# Allegro board BQ24090_TEST_V10A.brd
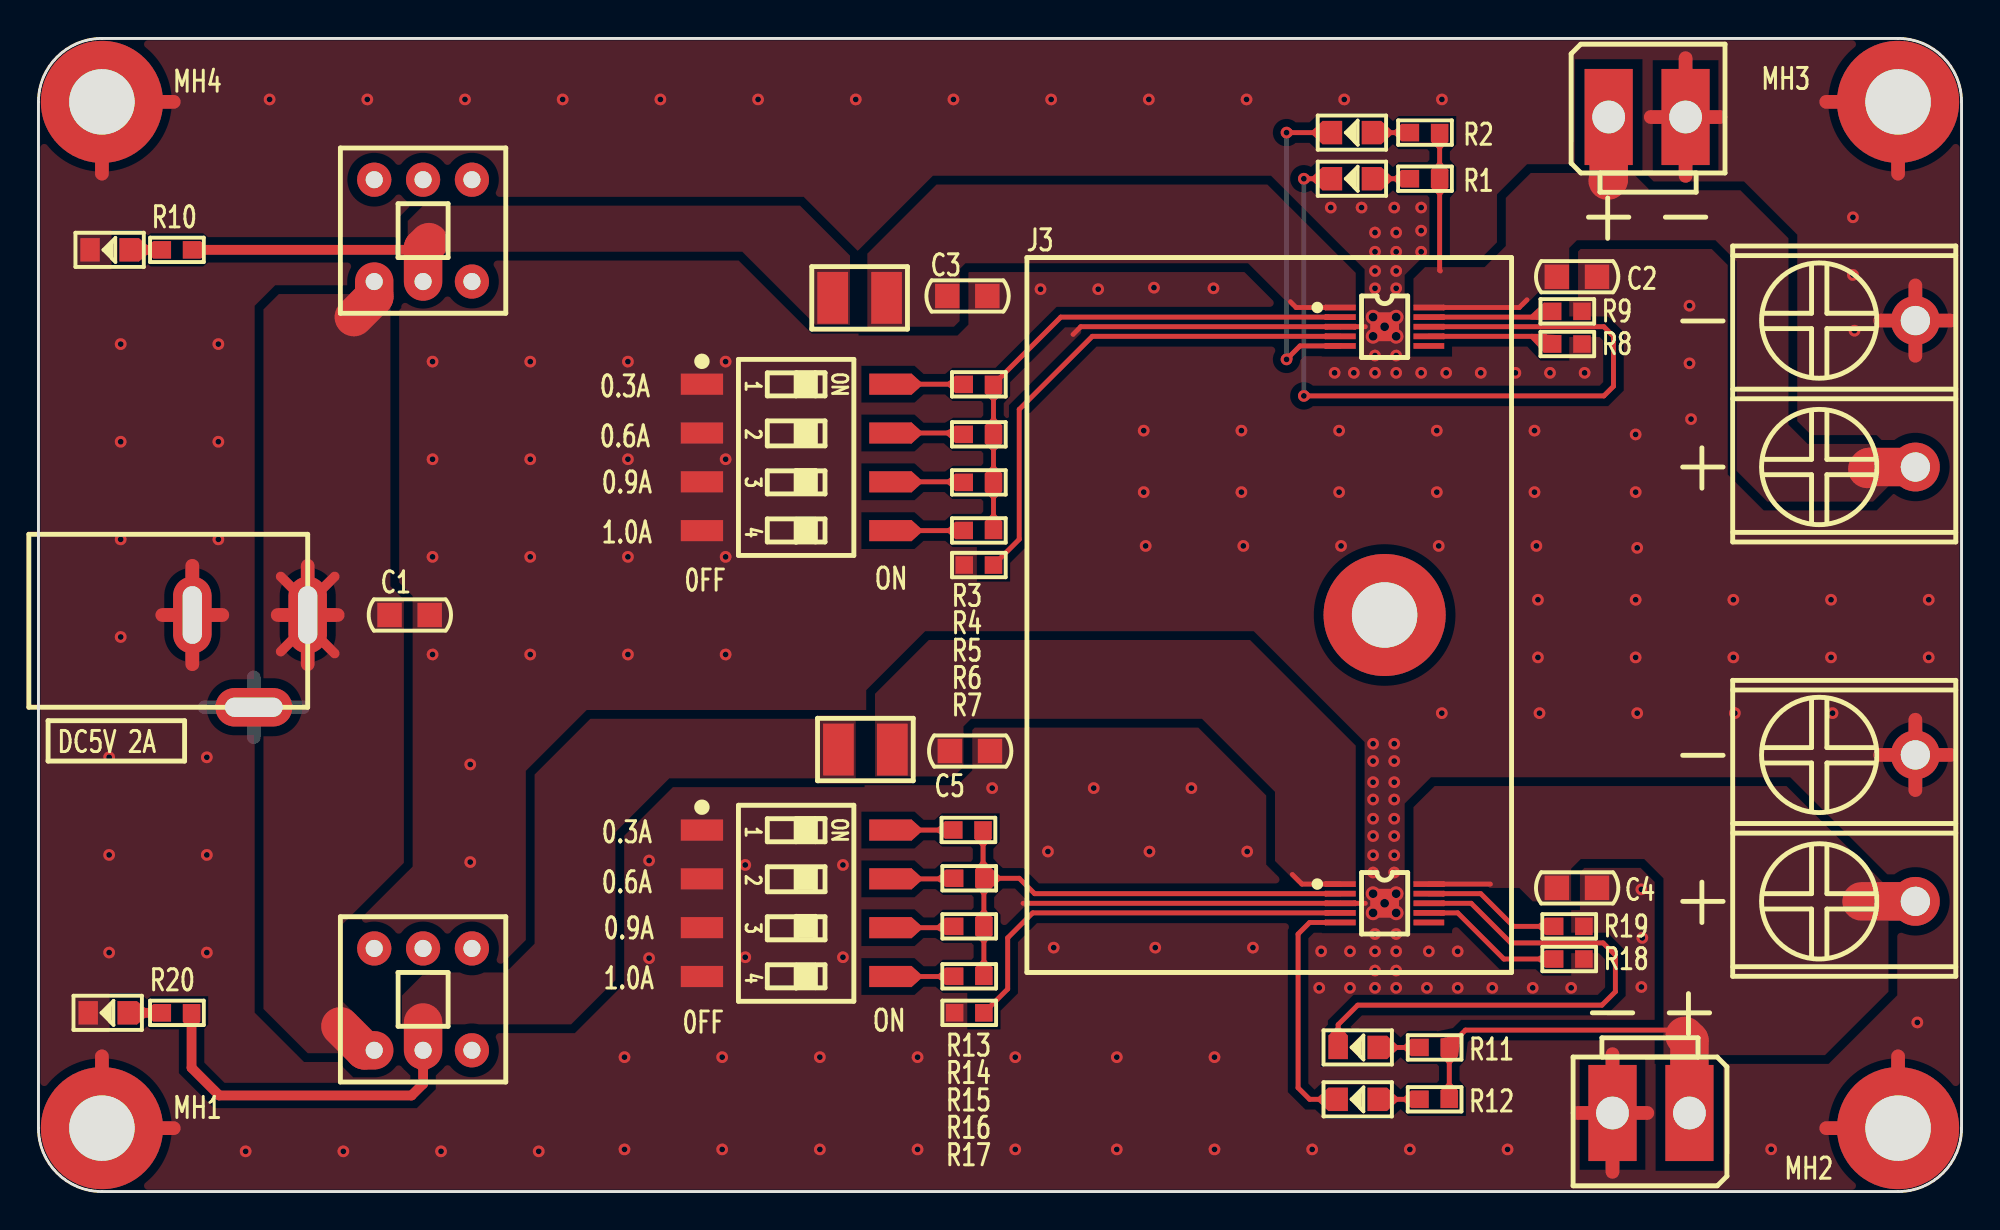
[diagram p0: board, top side]
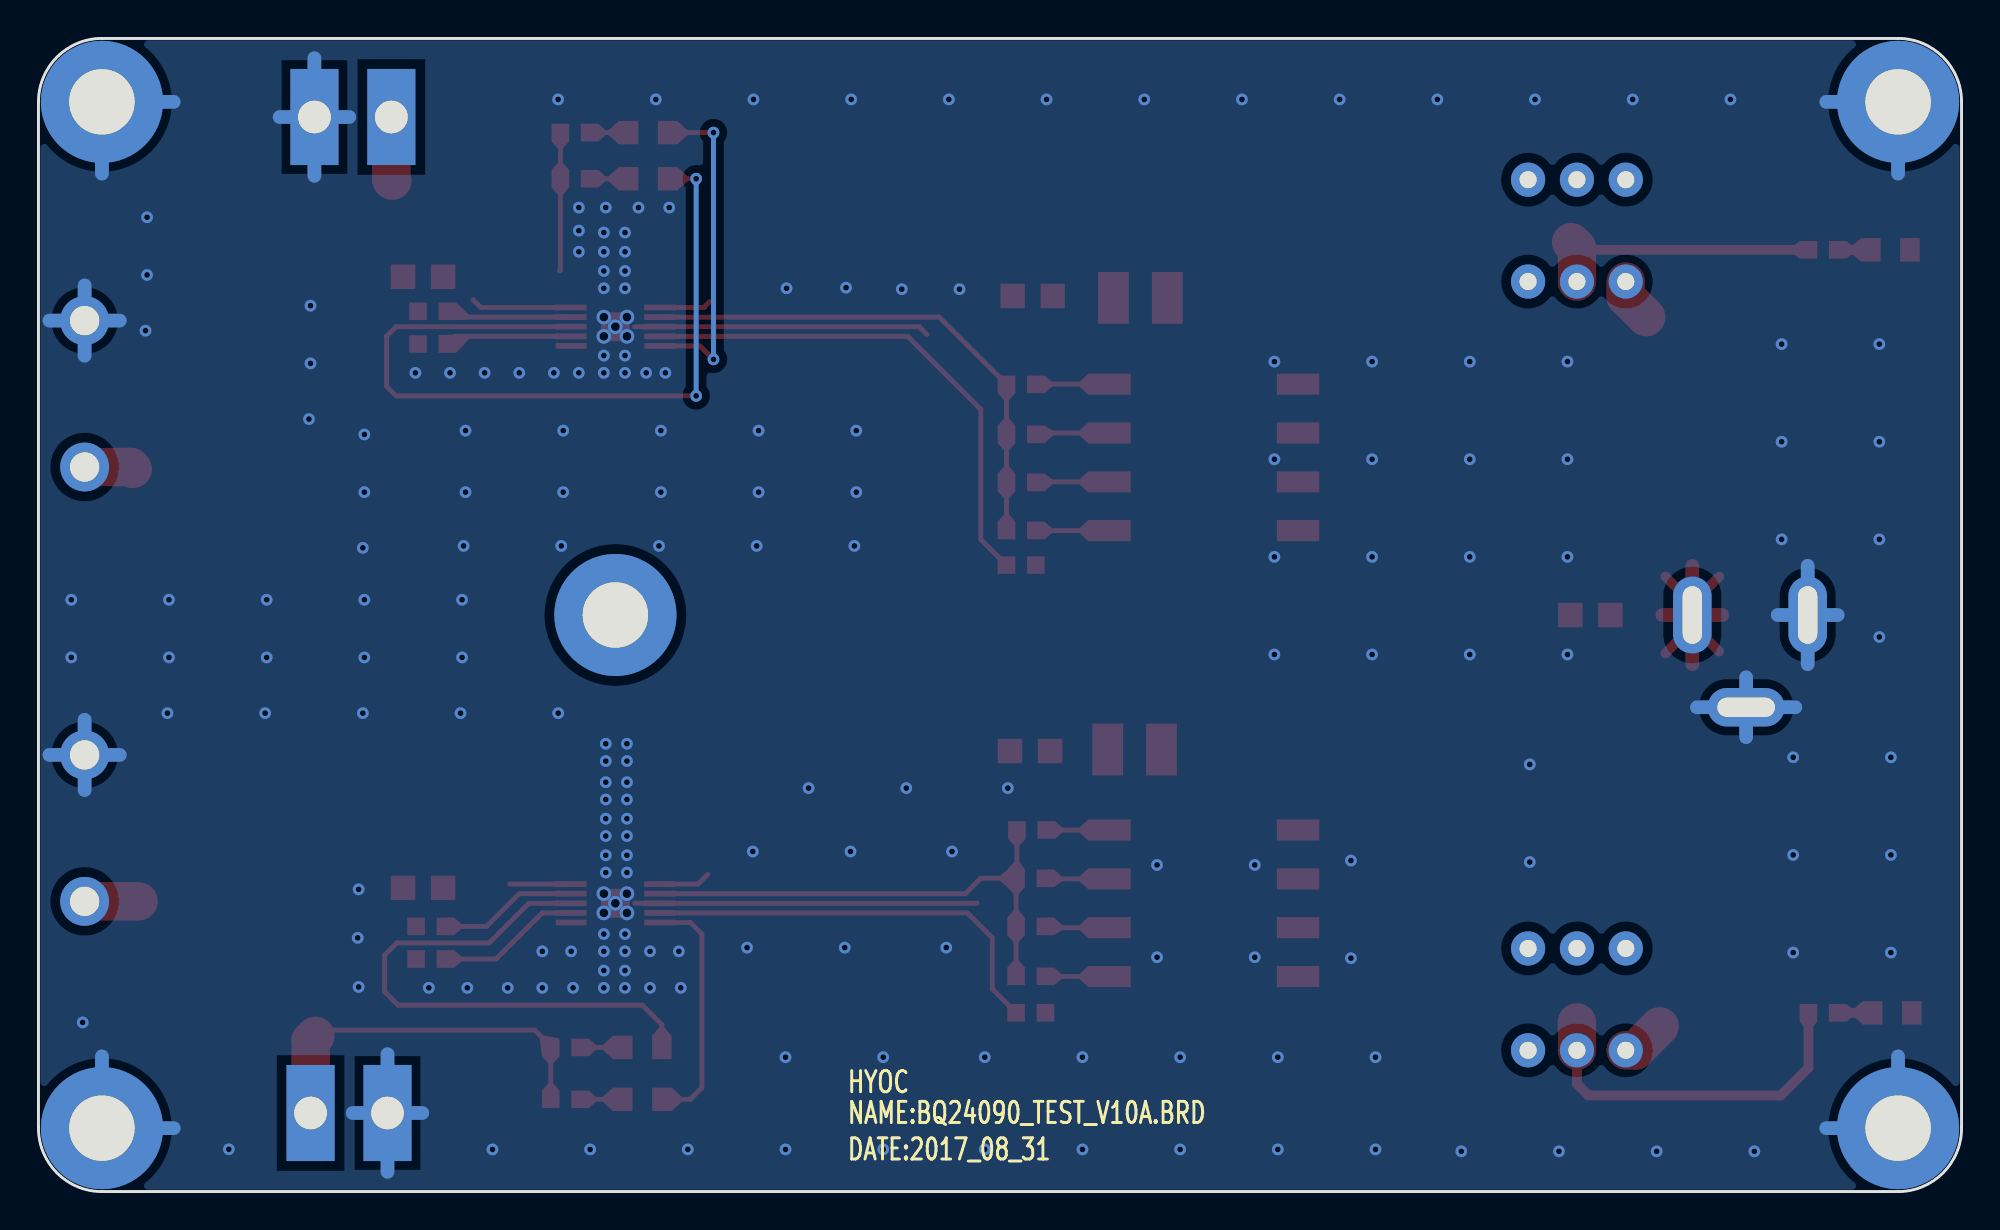
[diagram p1: board, bottom side, seen from below]

Outline 100 x 60 mm; copper layers: TOP, BOTTOM. Coordinates in mm from the lower left corner of the outline.
Outline path: 0,56.7 0,3.3 arc(0.97,0.97) 3.3,0 96.7,0 arc(99.03,0.97) 100,3.3 100,56.7 arc(99.03,59.03) 96.7,60 3.3,60 arc(0.97,59.03) 0,56.7

## Placement (name value [footprint] x y rotation side)
C1  10uF_25V  [CC0805]  19.3 30 0 top
C2  10uF_25V  [CC0805]  80 47.6 0 top
C3  10uF_25V  [CC0805]  48.3 46.6 0 top
C4  10uF_25V  [CC0805]  80 15.8 0 top
C5  10uF_25V  [CC0805]  48.44 22.92 0 top
D1  LED_RED  [LED0805]  68.3 52.7 180 top
D2  LED_GREEN  [LED0805]  68.3 55.1 180 top
D3  LED_GREEN  [LED0805]  3.7 49 180 top
D4  LED_RED  [LED0805]  68.6 7.5 180 top
D5  LED_GREEN  [LED0805]  68.6 4.8 180 top
D6  LED_GREEN  [LED0805]  3.6 9.3 180 top
DC1  -  [DC005]  8 30 0 top
F1  SMD1210-6V2A  [SMD-1210]  42.7 46.5 0 top
F2  SMD1210-6V2A  [SMD-1210]  43 23 0 top
J1  -  [POWER2A]  87.7 53 90 top
J2  -  [KF7R62-2P]  97.6 37.7 90 top
J3  HEAT-37x25x20  [HEAT-37X25X20]  70 30 90 top
J4  -  [POWER2A]  79.8 7 270 top
J5  -  [KF7R62-2P]  97.6 15.1 90 top
MH1  HOLD-M3  [HOLD250D134]  3.3 3.3 0 top
MH2  HOLD-M3  [HOLD250D134]  96.7 3.3 0 top
MH3  HOLD-M3  [HOLD250D134]  96.7 56.7 0 top
MH4  HOLD-M3  [HOLD250D134]  3.3 56.7 0 top
NOREF  -  []  0 0 90 top
NOREF#2  -  []  0 0 0 top
NOREF#3  -  []  0 0 90 top
NOREF#4  -  []  0 0 0 top
NOREF#5  -  []  0 0 90 top
NOREF#6  -  []  0 0 0 top
R1  1.5K  [RC0603]  72.1 52.7 0 top
R2  1.5K  [RC0603]  72.1 55.1 0 top
R3  1.8K  [RC0603]  48.9 42 180 top
R4  900R  [RC0603]  48.9 39.4 180 top
R5  600R  [RC0603]  48.9 36.9 180 top
R6  540R  [RC0603]  48.9 34.4 180 top
R7  2K  [RC0603]  48.9 32.6 180 top
R8  10K  [RC0603]  79.5 44.1 0 top
R9  10K  [RC0603]  79.5 45.8 0 top
R10  1.5K  [RC0603]  7.2 49 0 top
R11  1.5K  [RC0603]  72.6 7.5 0 top
R12  1.5K  [RC0603]  72.6 4.8 0 top
R13  1.8K  [RC0603]  48.36 18.82 180 top
R14  900R  [RC0603]  48.4 16.3 180 top
R15  600R  [RC0603]  48.4 13.8 180 top
R16  540R  [RC0603]  48.4 11.2 180 top
R17  2K  [RC0603]  48.4 9.3 180 top
R18  10K  [RC0603]  79.6 12.1 0 top
R19  10K  [RC0603]  79.6 13.8 0 top
R20  1.5K  [RC0603]  7.2 9.3 0 top
SW1  -  [DM-04-V]  39.4 38.2 270 top
SW2  -  [DM-04-V]  39.4 15 270 top
U1  BQ24090DGQR  [HVSSOP-10]  70 45 270 top
U2  -  [SWITCH_6P]  20 50 0 top
U3  BQ24090DGQR  [HVSSOP-10]  70 15 270 top
U4  -  [SWITCH_6P]  20 10 0 top

## Library data of the parts
C1-C5 = CAP NP_2
D1-D6 = LED_4
DC1 = DC005
F1 F2 = FUSE
J1 J4 = CON2
J2 J5 = CONN RCPT 2
J3 = HEAT-37x25x20
MH1-MH4 = Hold_1
R1-R20 = R_Generic
SW1 SW2 = SW DIP-4_0
U1 U3 = BQ24090
U2 U4 = SWITCH_6P

## Footprints (pads in the part's own frame, mm; a bottom-side part is the same pattern mirrored in y, then rotated)
CC0805
  rect 1.27x1.27 smd: 1(-1.041,0) 2(1.041,0)
DC005
  oval 2x4 hole 1x3: 1(6,0) 2(0,0)
  oval 4x2 hole 3x1: 3(3.2,-4.8)
DM-04-V
  rect 1.1x2.2 smd: 1(-3.81,-4.9) 2(-1.27,-4.9) 3(1.27,-4.9) 4(3.81,-4.9) 5(3.81,4.9) 6(1.27,4.9) 7(-1.27,4.9) 8(-3.81,4.9)
HEAT-37X25X20
  round 6.35 hole 3.404: 1(0,0)
HOLD250D134
  round 6.35 hole 3.404: 1(0,0)
HVSSOP-10
  rect 0.3x1.6 smd: 1(-1,-2.3) 2(-0.5,-2.3) 3(0,-2.3) 4(0.5,-2.3) 5(1,-2.3) 6(1,2.3) 7(0.5,2.3) 8(0,2.3) 9(-0.5,2.3) 10(-1,2.3)
  rect 1.5x1.5 smd: 11(0,0)
KF7R62-2P
  round 2.54 hole 1.524: 1(0,0) 2(7.62,0)
LED0805
  rect 1.016x1.219 smd: 1(-1.016,0) 2(1.016,0)
POWER2A
  rect 5x2.5 hole 1.7: 1(2.912,6.05) 2(2.912,2.05)
RC0603
  rect 0.914x0.914 smd: 1(-0.762,0) 2(0.762,0)
SMD-1210
  rect 1.6x2.7 smd: 1(-1.4,0) 2(1.4,0)
SWITCH_6P
  round 1.778 hole 0.889: 1(-2.54,-2.65) 2(0,-2.65) 3(2.54,-2.65) 4(2.54,2.65) 5(0,2.65) 6(-2.54,2.65)

## Nets
GND: C1.2 C2.2 C3.2 C4.2 C5.2 D3.2(CATHODE) D6.2(CATHODE) DC1.2 DC1.3 J1.2 J2.2 J4.2 J5.2 MH1.1 MH2.1 MH3.1 MH4.1 R7.2 R8.2 R9.2 R17.2 R18.2 R19.2 SW1.1 SW1.2 SW1.3 SW1.4 SW2.1 SW2.2 SW2.3 SW2.4 U1.3(VSS) U1.11(GND) U3.3(VSS) U3.11(GND)
VCC_5V: C1.1 DC1.1 U2.1 U4.1
VCC_VBAT1: C2.1 J1.1 J2.1 R1.2 R2.2 U1.10(OUT)
VCC_VBAT2: C4.1 J4.1 J5.1 R11.2 R12.2 U3.10(OUT)
BAT_#CHG1: D1.2(CATHODE) U1.8(C\H\G\)
BAT_#CHG2: D4.2(CATHODE) U3.8(C\H\G\)
BAT_#PG1: D2.2(CATHODE) U1.5(P\G\)
BAT_#PG2: D5.2(CATHODE) U3.5(P\G\)
N16776719: R8.1 U1.7(ISET2)
N16776765: C3.1 F1.2 U1.1(IN)
N16776879: R6.2 SW1.5
N16776893: R3.1 R4.1 R5.1 R6.1 U1.2(ISET)
N16776901: R7.1 U1.4(PRETERM)
N16777207: D2.1(ANODE) R2.1
N16777228: D1.1(ANODE) R1.1
N16796255: R9.1 U1.9(TS)
N16796428: R5.2 SW1.6
N16796448: R4.2 SW1.7
N16796468: R3.2 SW1.8
N16797086: R18.1 U3.7(ISET2)
N16797101: C5.1 F2.2 U3.1(IN)
N16797155: R16.2 SW2.5
N16797170: R13.1 R14.1 R15.1 R16.1 U3.2(ISET)
N16797177: R17.1 U3.4(PRETERM)
N16797234: D5.1(ANODE) R12.1
N16797242: D4.1(ANODE) R11.1
N16797325: R19.1 U3.9(TS)
N16797348: R15.2 SW2.6
N16797366: R14.2 SW2.7
N16797368: R13.2 SW2.8
N16797989: F1.1 R10.2 U2.2
N16798336: F2.1 R20.2 U4.2
N16798401: D6.1(ANODE) R20.1
N16798575: D3.1(ANODE) R10.1

Pads without a net: J3 1; U1 6; U2 3 4 5 6; U3 6; U4 3 4 5 6

## Via types
v1: diameter 0.61, hole 0.305, TOP to BOTTOM, 193 vias
v2: diameter 0.762, hole 0.457, TOP to BOTTOM, 10 vias

## Routing (per net, layer and track width the routed paths; a pad name or vN(x,y) marks a point on that pad's centre or on a via; arc(x,y) is an arc through that point)
GND: length 185.8
  TOP w0.254: 69,15 U3.3 51.2,15 ; 69,45 U1.3 54.2,45 53.8,44.6
  TOP w0.711: 97.6,43.49 J2.2 ; J2.2 95.77,45.32 ; J2.2 97.6,47.15 ; J2.2 99.43,45.32 ; 95.77,22.72 J5.2 ; J5.2 99.43,22.72 ; J5.2 97.6,24.55 ; J5.2 97.6,20.89 ; 3.3,52.97 MH4.1 7.03,56.7 ; 81.85,1.03 J4.2 ; J4.2 81.85,7.15 ; J4.2 83.66,4.09 ; J4.2 80.04,4.09 ; J1.2 85.65,58.97 ; J1.2 83.84,55.91 ; J1.2 87.46,55.91 ; J1.2 85.65,52.85 ; 96.7,7.03 MH2.1 92.97,3.3 ; 92.97,56.7 MH3.1 96.7,52.97 ; 6.44,30 DC1.2 ; DC1.2 9.56,30 ; DC1.2 8,27.44 ; DC1.2 8,32.56 ; 3.3,7.03 MH1.1 7.03,3.3
  BOTTOM w0.711: 8.64,25.2 DC1.3 ; DC1.3 11.2,26.76 ; DC1.3 11.2,23.64 ; DC1.3 13.76,25.2 ; DC1.2 9.56,30 ; DC1.2 8,27.44 ; DC1.2 8,32.56 ; DC1.2 6.44,30 ; 3.3,52.97 MH4.1 7.03,56.7 ; 81.85,1.03 J4.2 ; J4.2 80.04,4.09 ; J4.2 81.85,7.15 ; J4.2 83.66,4.09 ; 3.3,7.03 MH1.1 7.03,3.3 ; 95.77,45.32 J2.2 ; J2.2 97.6,43.49 ; J2.2 97.6,47.15 ; J2.2 99.43,45.32 ; 92.97,56.7 MH3.1 96.7,52.97 ; J1.2 87.46,55.91 ; J1.2 85.65,52.85 ; J1.2 85.65,58.97 ; J1.2 83.84,55.91 ; J5.2 99.43,22.72 ; J5.2 95.77,22.72 ; J5.2 97.6,20.89 ; J5.2 97.6,24.55 ; 96.7,7.03 MH2.1 92.97,3.3
  vias: v1(3.67,22.6) v1(3.67,17.52) v1(3.67,12.44) v1(4.28,44.1) v1(4.28,39.02) v1(4.28,33.94) v1(4.28,28.86) v1(8.76,22.6) v1(8.76,17.52) v1(8.76,12.44) v1(9.36,44.1) v1(9.36,39.02) v1(9.36,33.94) v1(10.77,2.09) v1(12.02,56.83) v1(15.85,2.09) v1(17.1,56.83) v1(20.49,43.18) v1(20.49,38.1) v1(20.49,33.02) v1(20.49,27.94) v1(20.93,2.09) v1(22.18,56.83) v1(22.45,22.22) v1(22.45,17.14) v1(25.57,43.18) v1(25.57,38.1) v1(25.57,33.02) v1(25.57,27.94) v1(26.01,2.09) v1(27.26,56.83) v1(30.47,6.99) v1(30.47,2.19) v1(30.65,43.18) v1(30.65,38.1) v1(30.65,33.02) v1(30.65,27.94) v1(31.75,17.22) v1(31.75,12.14) v1(32.34,56.83) v1(35.55,6.99) v1(35.55,2.19) v1(35.73,43.18) v1(35.73,38.1) v1(35.73,33.02) v1(35.73,27.94) v1(36.75,16.99) v1(36.75,12.19) v1(37.42,56.83) v1(40.63,6.99) v1(40.63,2.19) v1(41.83,16.99) v1(41.83,12.19) v1(42.5,56.83) v1(45.71,6.99) v1(45.71,2.19) v1(47.58,56.83) v1(49.59,20.99) v1(50.79,6.99) v1(50.79,2.19) v1(52.11,46.95) v1(52.49,17.69) v1(52.66,56.83) v1(52.79,12.69) v1(54.87,20.99) v1(55.11,46.95) v1(56.07,6.99) v1(56.07,2.19) v1(57.47,39.59) v1(57.47,36.39) v1(57.57,33.59) v1(57.74,56.83) v1(57.77,17.69) v1(58.01,47.03) v1(58.07,12.69) v1(59.95,20.99) v1(61.1,47) v1(61.15,6.99) v1(61.15,2.19) v1(62.55,39.59) v1(62.55,36.39) v1(62.65,33.59) v1(62.82,56.83) v1(62.85,17.69) v1(63.15,12.69) v1(66.23,2.19) v1(66.6,10.6) v1(66.7,12.5) v1(67.2,51.2) v1(67.4,42.6) v1(67.63,39.59) v1(67.63,36.39) v1(67.73,33.59) v1(67.9,56.83) v1(68.2,12.5) v1(68.2,10.6) v1(68.4,42.6) v1(68.8,51.2) v1(69.4,23.3) v1(69.4,22.4) v1(69.4,21.3) v1(69.4,20.4) v1(69.4,19.4) v1(69.4,18.5) v1(69.4,17.5) v1(69.4,16.6) v1(69.5,49.9) v1(69.5,48.9) v1(69.5,47.9) v1(69.5,47) v1(69.5,43.5) v1(69.5,42.6) v1(69.5,13.4) v1(69.5,12.5) v1(69.5,11.5) v1(69.5,10.6) v1(70.5,51.2) v1(70.5,23.3) v1(70.5,22.4) v1(70.5,21.3) v1(70.5,20.4) v1(70.5,19.4) v1(70.5,18.5) v1(70.5,17.5) v1(70.5,16.6) v1(70.6,49.9) v1(70.6,48.9) v1(70.6,47.9) v1(70.6,47) v1(70.6,43.5) v1(70.6,42.6) v1(70.6,13.4) v1(70.6,12.5) v1(70.6,11.5) v1(70.6,10.6) v1(71.31,2.19) v1(71.9,51.2) v1(71.9,50) v1(71.9,48.9) v1(71.9,42.6) v1(72.2,10.6) v1(72.3,12.5) v1(72.71,39.59) v1(72.71,36.39) v1(72.81,33.59) v1(72.98,56.83) v1(72.97,24.89) v1(73.2,42.6) v1(73.8,12.5) v1(73.8,10.6) v1(75,42.6) v1(75.6,10.6) v1(76.39,2.19) v1(76.8,42.6) v1(77.7,10.6) v1(77.79,39.59) v1(77.79,36.39) v1(77.89,33.59) v1(77.97,30.79) v1(77.97,27.79) v1(78.05,24.89) v1(78.6,42.6) v1(79.7,10.6) v1(80.4,42.6) v1(83.05,39.39) v1(83.05,36.39) v1(83.13,33.49) v1(83.05,30.79) v1(83.05,27.79) v1(83.13,24.89) v1(83.35,15.72) v1(83.4,13.2) v1(83.35,10.64) v1(85.85,46.09) v1(85.85,43.09) v1(85.93,40.19) v1(88.13,30.79) v1(88.13,27.79) v1(88.21,24.89) v1(90.1,2.2) v1(93.21,30.79) v1(93.21,27.79) v1(93.29,24.89) v1(94.35,50.69) v1(94.35,47.69) v1(94.43,44.79) v1(97.7,8.8) v1(98.29,30.79) v1(98.29,27.79) v2(69.4,45.5) v2(69.4,44.5) v2(69.4,15.5) v2(69.4,14.5) v2(70,45) v2(70,15) v2(70.6,45.5) v2(70.6,44.5) v2(70.6,15.5) v2(70.6,14.5)
VCC_5V: length 20.7
  TOP w0.508: 15.4,32 14,30.6 12.6,32 ; 14,29.5 12.6,28.1 ; 14,29.4 15.4,28
  TOP w0.711: 14,32.56 DC1.1 ; DC1.1 12.44,30 ; DC1.1 14,27.44 ; DC1.1 15.56,30
  TOP w2: U4.1 16.95,7.35 15.7,8.6 ; 16.4,45.5 17.46,46.56 U2.1
VCC_VBAT1: length 18.4
  TOP w0.254: 77.4,46.4 77,46 U1.10 ; R2.2 R1.2 72.86,47.94 72.9,47.9
  TOP w2: 95.1,37.6 95.2,37.7 J2.1 ; J1.1 81.65,52.65 81.6,52.6
VCC_VBAT2: length 25.6
  TOP w0.254: 85.6,8.1 85.3,8.4 74.2,8.4 73.36,7.56 R11.2 R12.2 ; U3.10 75.5,16
  TOP w2: J4.1 85.85,7.85 85.6,8.1 ; J5.1 94.8,15.1
BAT_#CHG1: length 41.5
  TOP w0.254: v1(65.8,41.4) 81.4,41.4 81.9,41.9 81.9,44.5 81.4,45 U1.8 ; v1(65.8,52.7) D1.2
  BOTTOM w0.254: v1(65.8,41.4) v1(65.8,52.7)
BAT_#CHG2: length 29
  TOP w0.254: U3.8 74.5,15 76.56,12.94 81.36,12.94 82,12.3 82,10.4 81.3,9.7 68.6,9.7 67.58,8.68 D4.2
BAT_#PG1: length 17.3
  TOP w0.254: D2.2 v1(64.9,55.1) ; v1(64.9,43.3) 65.6,44 U1.5
  BOTTOM w0.254: v1(64.9,55.1) v1(64.9,43.3)
BAT_#PG2: length 12.8
  TOP w0.254: D5.2 66.1,4.8 65.5,5.4 65.5,13.4 66.1,14 U3.5
N16776719: length 6.6
  TOP w0.254: R8.1 78.34,44.5 U1.7
N16776765: length 2.7
  TOP w0.254: U1.1 65.4,46 65.1,46.3
N16776879: length 3.8
  TOP w0.254: R6.2 48.13,34.39 SW1.5
N16776893: length 27.1
  TOP w0.254: R6.1 R5.1 R4.1 R3.1 53.16,45.5 U1.2
N16776901: length 26.9
  TOP w0.254: U1.4 54.8,44.5 51,40.7 51,33.94 R7.1
N16777207: length 2
  TOP w0.254: D2.1 R2.1
N16777228: length 2
  TOP w0.254: D1.1 R1.1
N16796255: length 6.7
  TOP w0.254: U1.9 78.64,45.5 78.74,45.6 R9.1
N16796428: length 3.9
  TOP w0.254: R5.2 48.11,36.93 SW1.6
N16796448: length 3.9
  TOP w0.254: SW1.7 48.07,39.47 R4.2
N16796468: length 3.8
  TOP w0.254: SW1.8 48.13,42.01 R3.2
N16797086: length 7.5
  TOP w0.254: R18.1 76.2,12.1 73.8,14.5 U3.7
N16797101: length 2.7
  TOP w0.254: U3.1 65.7,16 65.2,16.5
N16797155: length 3.3
  TOP w0.254: SW2.5 47.63,11.19 R16.2
N16797170: length 26.5
  TOP w0.254: R13.1 49.12,16.34 R14.1 ; R16.1 R15.1 R14.1 ; R14.1 51,16.3 51.8,15.5 U3.2
N16797177: length 22.3
  TOP w0.254: U3.4 51.7,14.5 50.4,13.2 50.4,10.54 R17.1
N16797234: length 2.2
  TOP w0.254: D5.1 R12.1
N16797242: length 2.2
  TOP w0.254: D4.1 R11.1
N16797325: length 7.2
  TOP w0.254: U3.9 75,15.5 76.7,13.8 R19.1
N16797348: length 3.4
  TOP w0.254: R15.2 47.57,13.73 SW2.6
N16797366: length 3.4
  TOP w0.254: R14.2 47.61,16.27 SW2.7
N16797368: length 3.3
  TOP w0.254: SW2.8 47.59,18.81 R13.2
N16797989: length 14.3
  TOP w0.508: R10.2 19.9,49 20,49.1
  TOP w2: 20.3,49.4 20,49.1 U2.2
N16798336: length 18.9
  TOP w0.508: R20.2 7.96,6.44 9.4,5 19.4,5 20,5.6 U4.2
  TOP w2: U4.2 20,8.8
N16798401: length 1.8
  TOP w0.508: D6.1 R20.1
N16798575: length 1.7
  TOP w0.508: R10.1 D3.1

## Copper pours and planes (outline as drawn; the poured copper is in the pictures)
GND on TOP: 99.9,56.7 98.96,58.96 96.7,59.9 3.3,59.9 1.05,58.95 0.1,56.7 0.1,3.3 1.05,1.05 3.3,0.1 96.7,0.1 98.95,1.05 99.9,3.3 ; 2 cut-outs
GND on BOTTOM: 99.9,56.7 98.96,58.96 96.7,59.9 3.3,59.9 1.05,58.95 0.1,56.7 0.1,3.3 1.05,1.05 3.3,0.1 96.7,0.1 98.95,1.05 99.9,3.3
VCC_5V on TOP: 17.9,46.7 18.3,46.3 18.3,31.5 19,30.8 19,17.1 15.8,13.9 15.8,9.9 16.9,8.8 16.9,8.3 15.8,7.2 14,7.2 11.7,9.5 11.7,45.9 12.5,46.7
VCC_VBAT1 on TOP: 71.5,45.9 77.1,45.9 78.1,46.9 79.6,46.9 79.6,49.1 80,49.5 87.2,49.5 88.3,48.4 88.3,37.5 89.9,35.9 95.4,35.9 96.2,36.7 96.2,38.1 95.4,38.9 92,38.9 91,39.9 91,49.6 88.5,52.1 83.8,52.1 82.9,53 77.6,53 76.3,51.7 76.3,49.2 75.2,48.1 72.1,48.1 71.5,47.5
VCC_VBAT2 on TOP: 71.5,15.8 77,15.8 77.7,15.1 79.7,15.1 79.7,16.8 80.2,17.3 83.5,17.3 84.5,16.3 84.5,7.1 92.9,7.1 96.2,10.4 96.2,15.8 90.9,21.1 72.6,21.1 71.5,20
N16776765 on TOP: 43.1,45 47.6,45 47.9,45.3 47.9,48 48.2,48.3 62.9,48.3 65.3,45.9 68.5,45.9 68.5,47.8 63.9,52.4 46.7,52.4 43.1,48.8
N16776879 on TOP (solid shape): 45.92,34.47 45.95,34.39 45.92,34.31 45.4,33.84 44.27,34.39 45.4,34.94
N16796428 on TOP (solid shape): 45.92,37.01 45.95,36.93 45.92,36.85 45.4,36.38 44.27,36.93 45.4,37.48
N16796448 on TOP (solid shape): 45.92,39.55 45.95,39.47 45.92,39.39 45.4,38.92 44.27,39.47 45.4,40.02
N16796468 on TOP (solid shape): 45.92,42.09 45.95,42.01 45.92,41.93 45.4,41.46 44.27,42.01 45.4,42.56
N16797101 on TOP: 43.5,21.6 47.6,21.6 48.1,22.1 48.1,24.2 48.5,24.6 60.5,24.6 64.3,20.8 64.3,17.2 65.7,15.8 68.5,15.8 68.5,23.2 63,28.7 46.3,28.7 43.5,25.9
N16797155 on TOP (solid shape): 45.92,11.27 45.95,11.19 45.92,11.11 45.4,10.64 44.27,11.19 45.4,11.74
N16797348 on TOP (solid shape): 45.92,13.81 45.95,13.73 45.92,13.65 45.4,13.18 44.27,13.73 45.4,14.28
N16797366 on TOP (solid shape): 45.92,16.35 45.95,16.27 45.92,16.19 45.4,15.72 44.27,16.27 45.4,16.82
N16797368 on TOP (solid shape): 45.92,18.89 45.95,18.81 45.92,18.73 45.4,18.26 44.27,18.81 45.4,19.36
N16797989 on TOP: 20.7,47.7 20.7,48.4 21.2,48.9 36.6,48.9 40.4,45.1 42.2,45.1 42.2,48.7 39.6,51.3 20,51.3 19.2,50.5 19.2,47.9 19.4,47.7
N16798336 on TOP: 20.7,7.6 20.7,8.2 21.2,8.7 27.7,8.7 30,11 30,18.7 32.8,21.5 42.5,21.5 42.5,24.6 28.7,24.6 25.8,21.7 25.8,12.9 24.3,11.4 20.1,11.4 18.9,10.2 18.9,7.8 19.1,7.6
VCC_VBAT2 on TOP (solid shape): 73.81,8.15 73.91,8.11 73.95,8.02 73.82,7.04 73.34,7.48 72.9,7.96
BAT_#CHG1 on TOP (solid shape): 67.32,52.7 66.78,52.09 66.19,52.62 66.17,52.7 66.19,52.78 66.78,53.31
BAT_#CHG2 on TOP (solid shape): 67.51,8.59 67.58,8.62 67.66,8.59 68.09,8.11 67.58,7.47 67.08,8.11
BAT_#PG1 on TOP (solid shape): 67.32,55.1 66.78,54.49 66.19,55.02 66.17,55.1 66.19,55.18 66.78,55.71
BAT_#PG2 on TOP (solid shape): 67.62,4.8 67.08,4.19 66.49,4.72 66.47,4.8 66.49,4.88 67.08,5.41
N16776719 on TOP (solid shape): 79.2,44.56 78.77,44.09 78.28,43.64 77.54,44.42 77.53,44.56 77.64,44.63
N16777207 on TOP (solid shape): 70.41,55.18 70.43,55.1 70.41,55.02 69.82,54.49 69.28,55.1 69.82,55.71
N16777228 on TOP (solid shape): 70.41,52.78 70.43,52.7 70.41,52.62 69.82,52.09 69.28,52.7 69.82,53.31
N16796255 on TOP (solid shape): 78.77,45.81 78.28,45.34 77.62,45.38 77.53,45.46 77.55,45.58 78.28,46.26
N16797234 on TOP (solid shape): 70.71,4.88 70.73,4.8 70.71,4.72 70.12,4.19 69.58,4.8 70.12,5.41
N16797242 on TOP (solid shape): 70.71,7.58 70.73,7.5 70.71,7.42 70.12,6.89 69.58,7.5 70.12,8.11
N16798336 on TOP (solid shape): 20.63,6.72 20.18,6.27 20,6.2 19.82,6.27 19.37,6.72 20,7.41
N16798401 on TOP (solid shape): 5.7,9.43 5.73,9.3 5.7,9.17 5.12,8.69 4.55,9.3 5.12,9.91
N16798575 on TOP (solid shape): 5.8,49.13 5.83,49 5.8,48.87 5.22,48.39 4.65,49 5.22,49.61

Small or netless copper shapes (teardrops, artwork), in the pictures only: 60 on TOP, 4 on BOTTOM

## Text on the board
Ref Des/Silkscreen Bottom: HYOC | NAME:BQ24090_TEST_V10A.BRD | DATE:2017_08_31
Ref Des/Silkscreen Top: DC5V 2A | 0.3A | 0.6A | 0.9A | 1.0A | 0FF | ON
BODY_CENTER: FIGURE | SIZE | 0.3048 | 0.4572 | 0.889 | 1.524 | 1.7 | 3.4036 | 3.0x1.0 | DRILL CHART: TOP to BOTTOM | ALL UNITS ARE IN MILLIMETERS | PLATED | QTY | 193 | 10 | 12 | 4 | 5 | 2 | 1
